# Altium PCB UART Converter use MCP2200.PcbDoc
Units mm, origin at the board's own origin, x right, y up, seen from the top; angles counter-clockwise.
Board outline 47.74 x 38.73 mm, 4 copper layers (Top Layer, GND, Power, Bottom Layer), stack 0.86 mm thick; 30 components, 25 nets, 105 pads, 32 vias.
Unrouted connection lines stored in the file: 24.
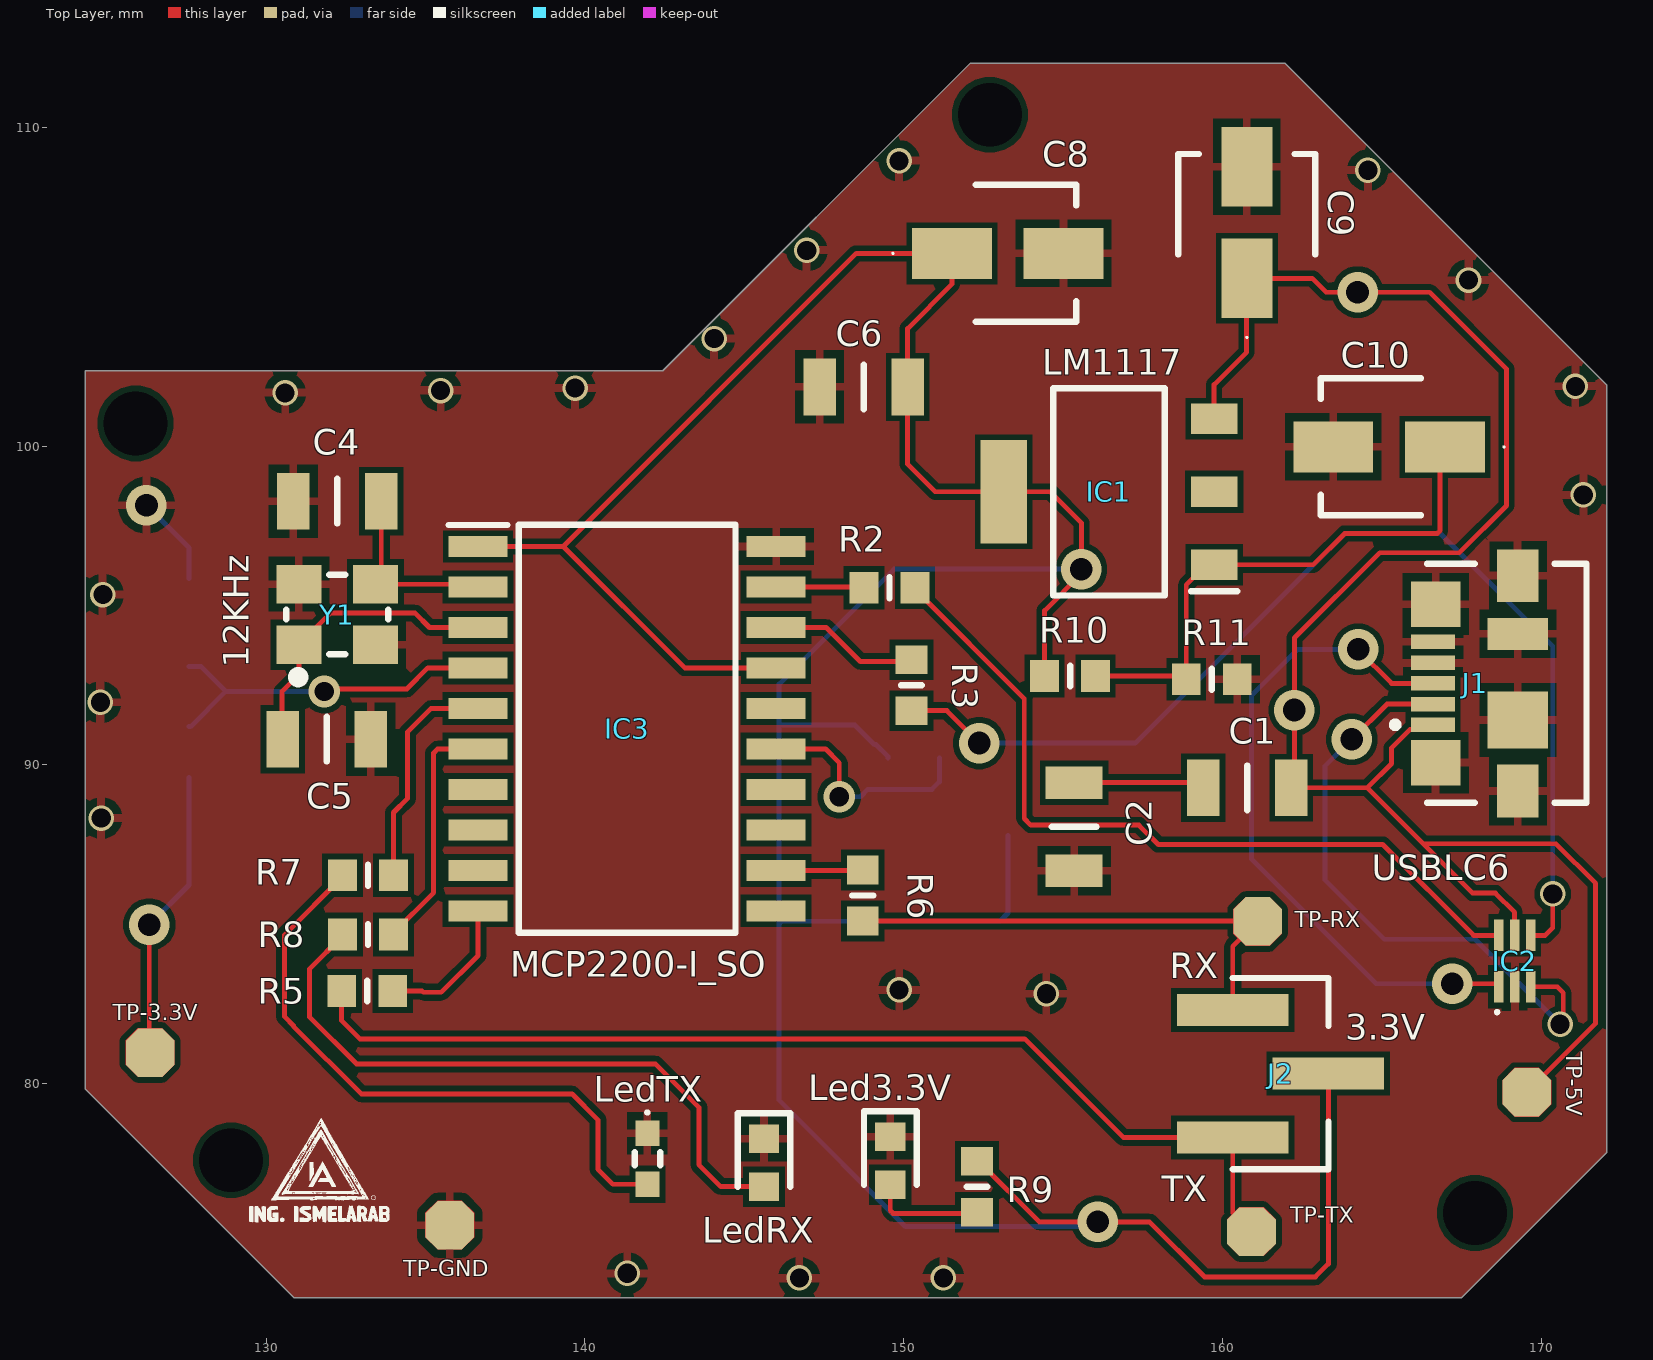
[diagram p0: Top Layer view]
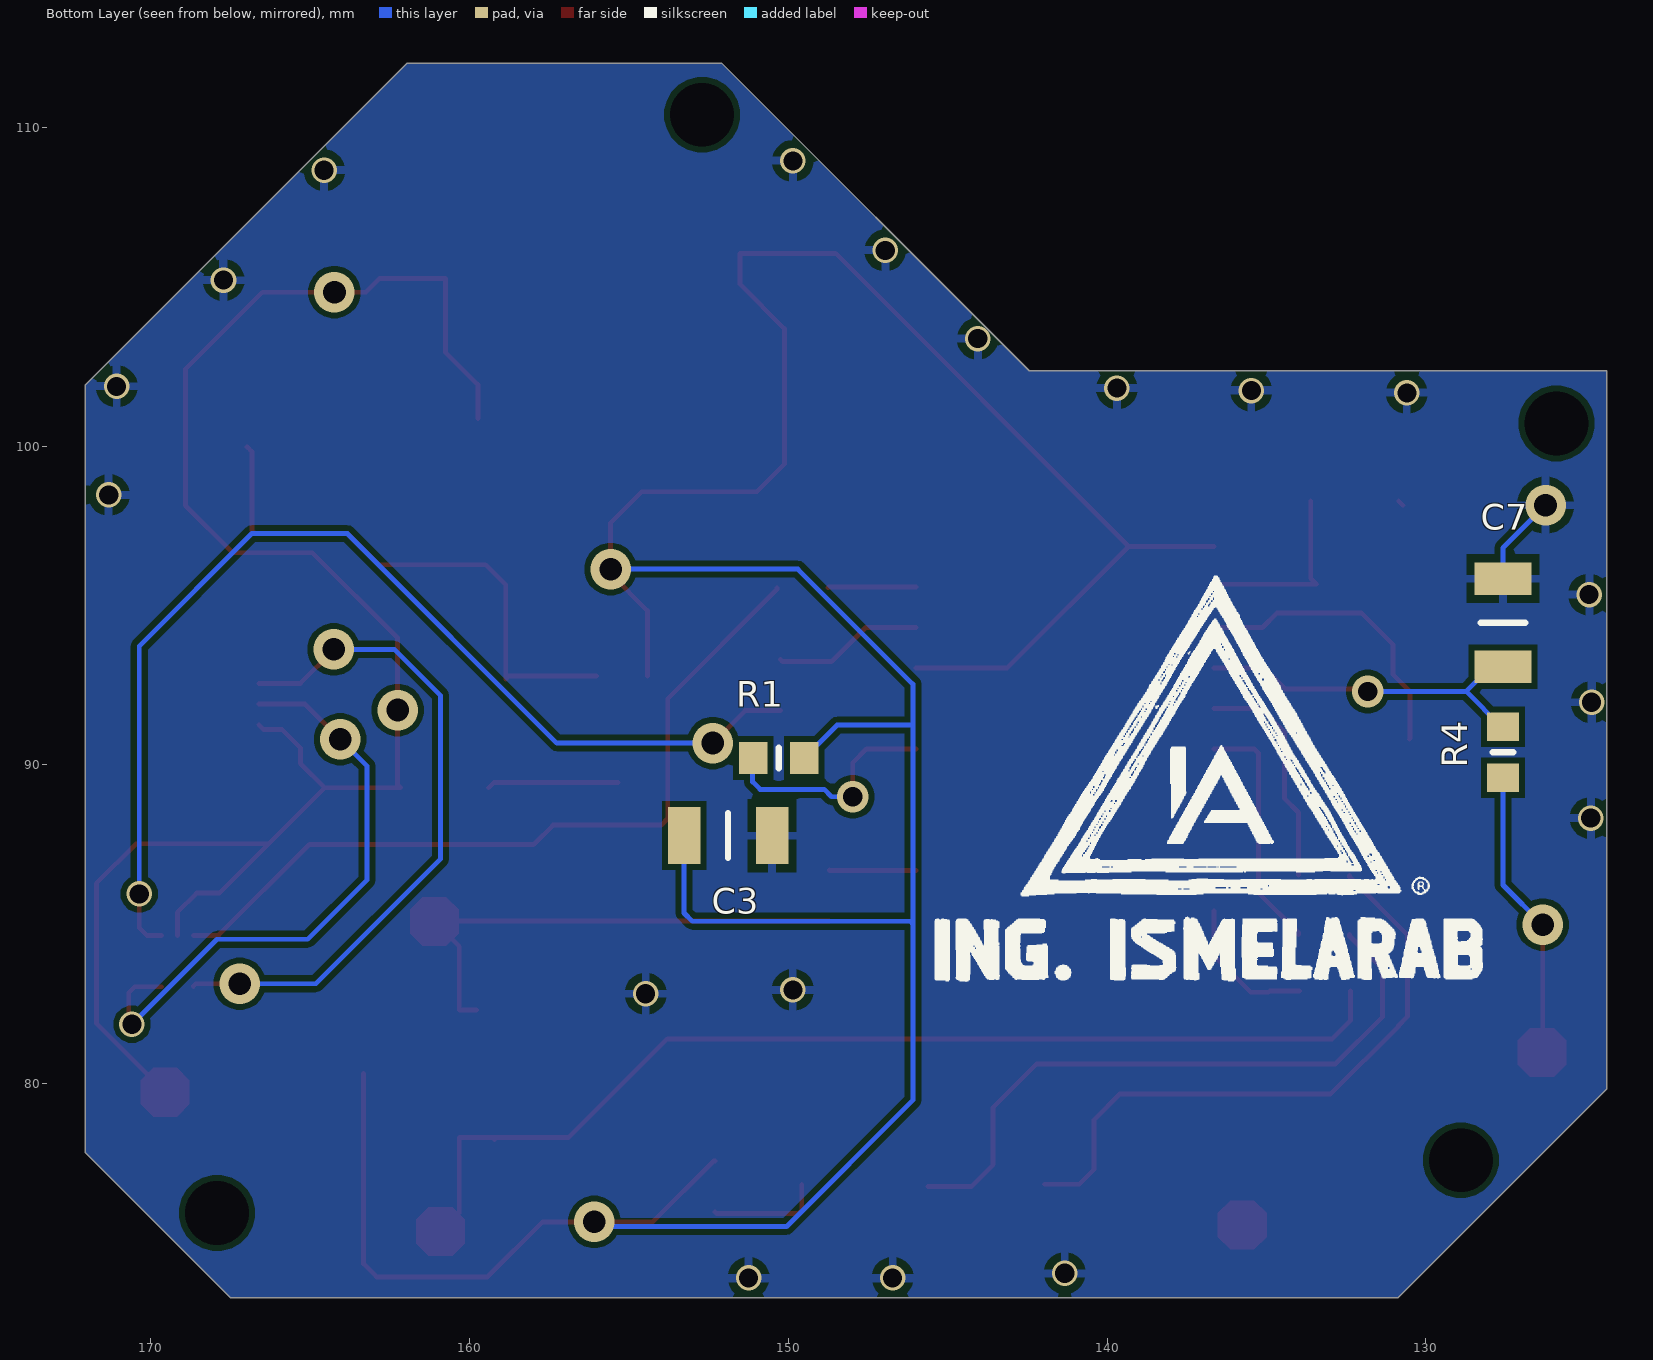
[diagram p1: Bottom Layer view, seen from below]
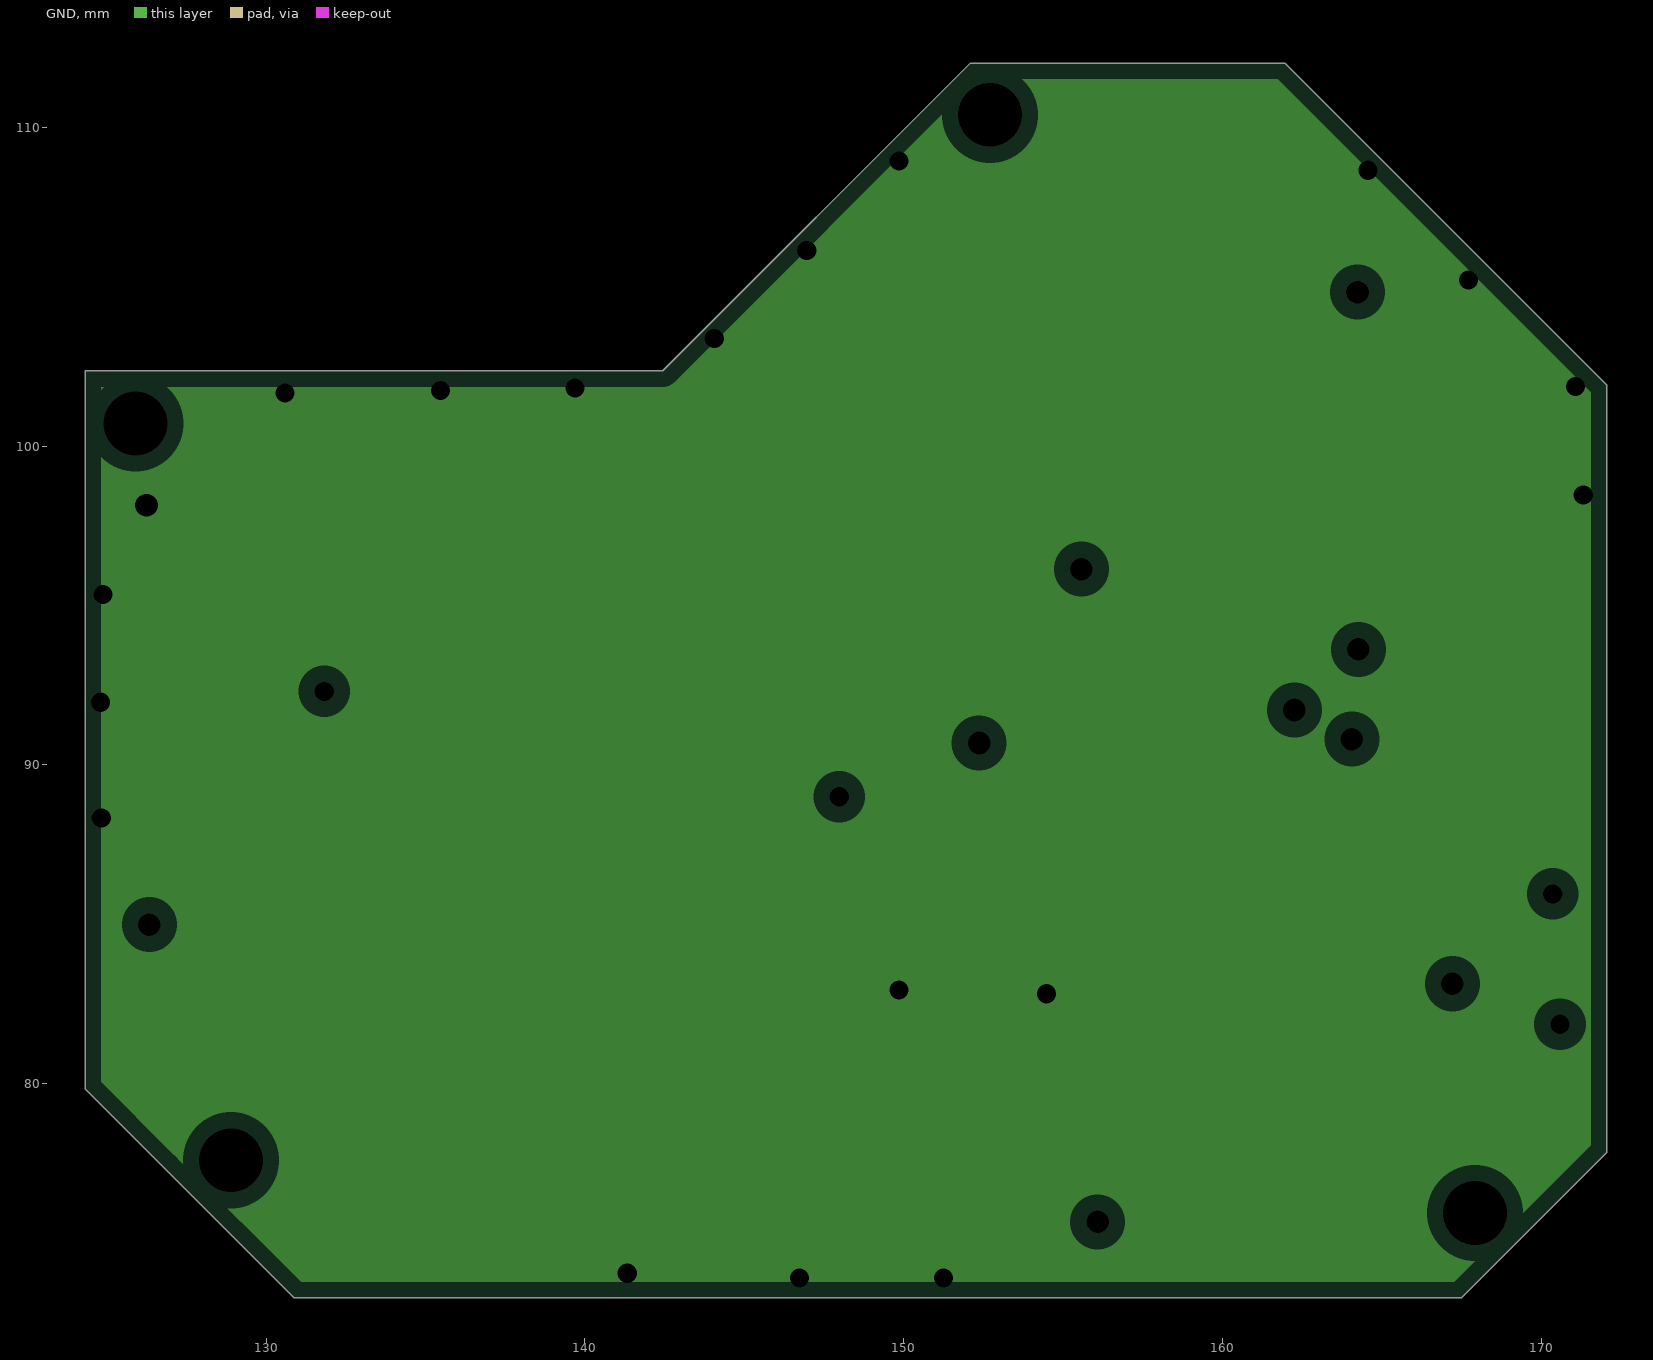
[diagram p2: GND, clearances drawn from the general rule]
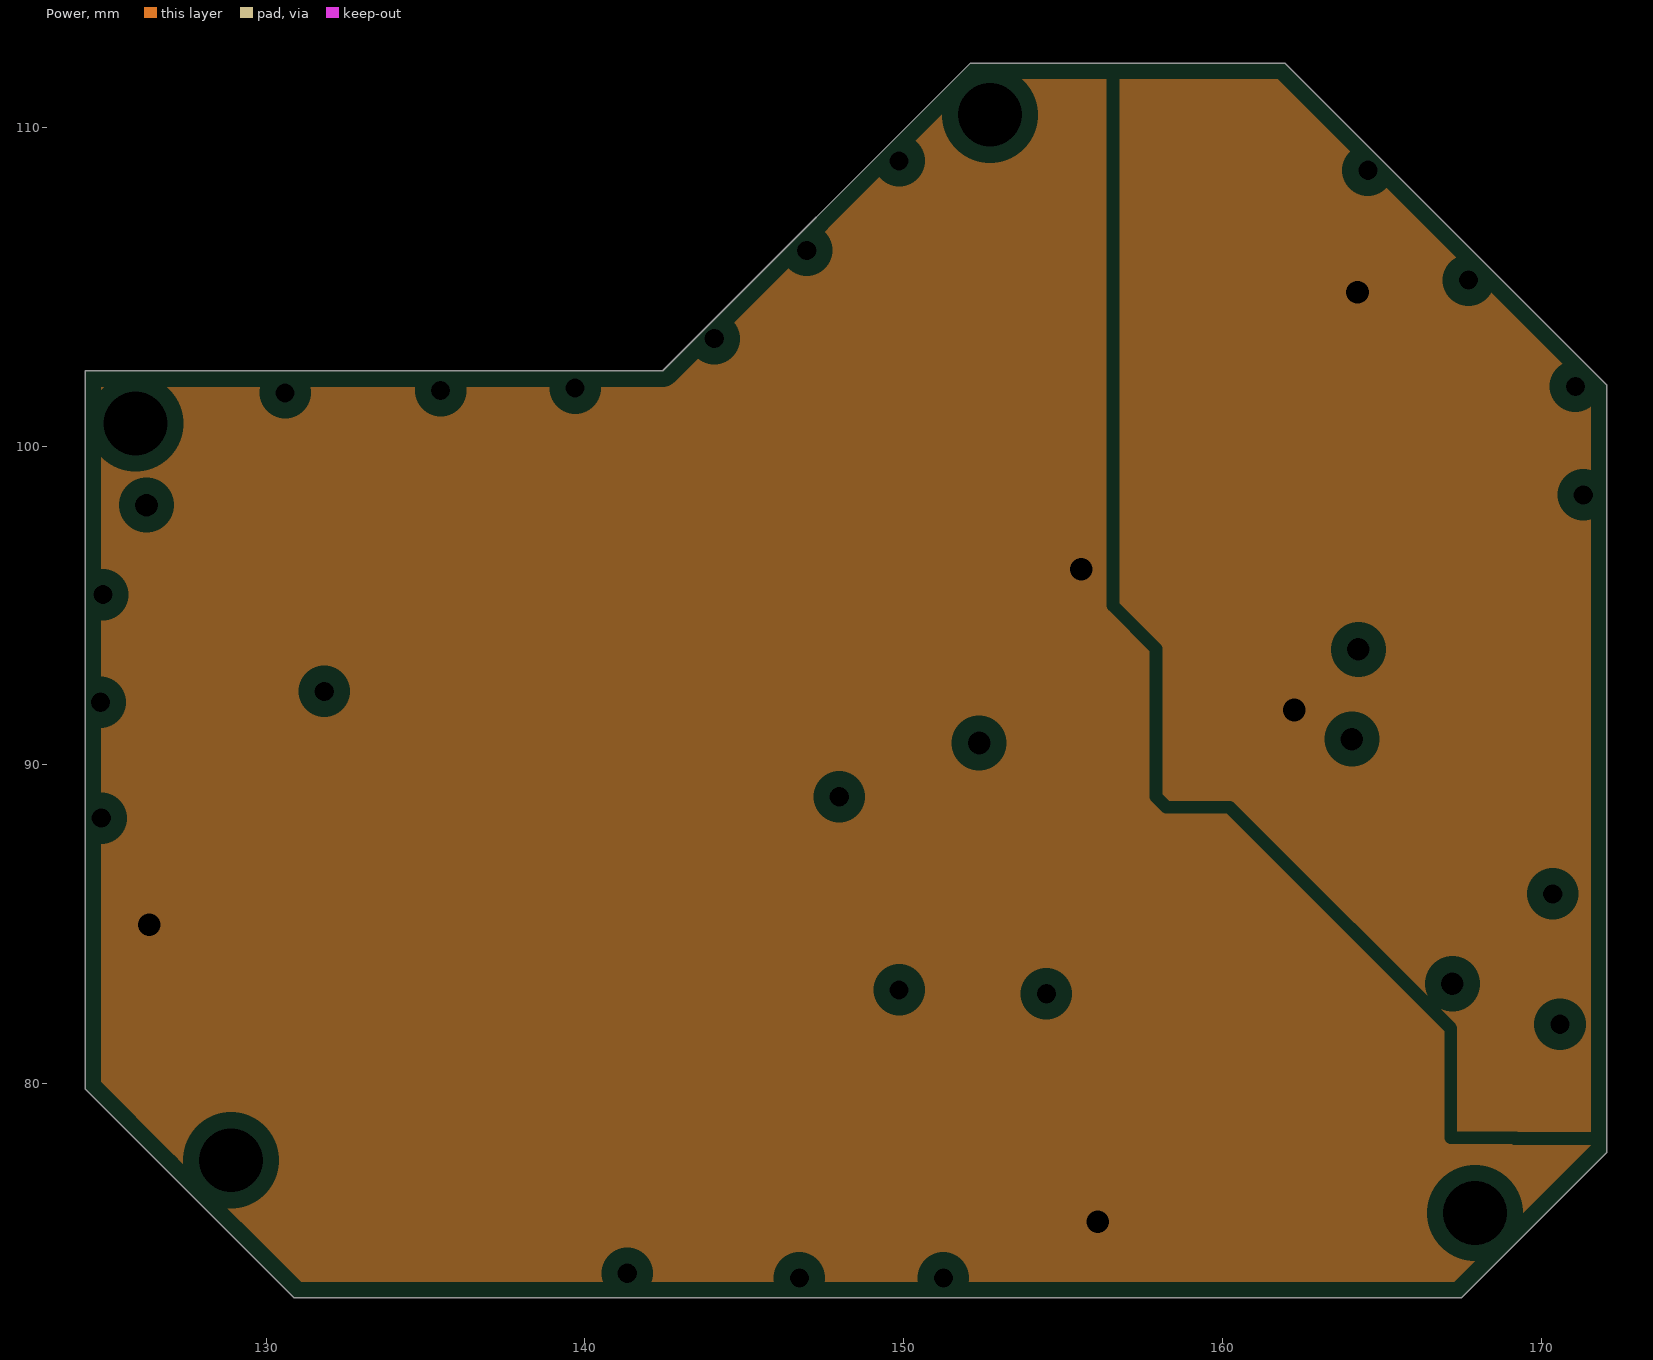
[diagram p3: Power, clearances drawn from the general rule]
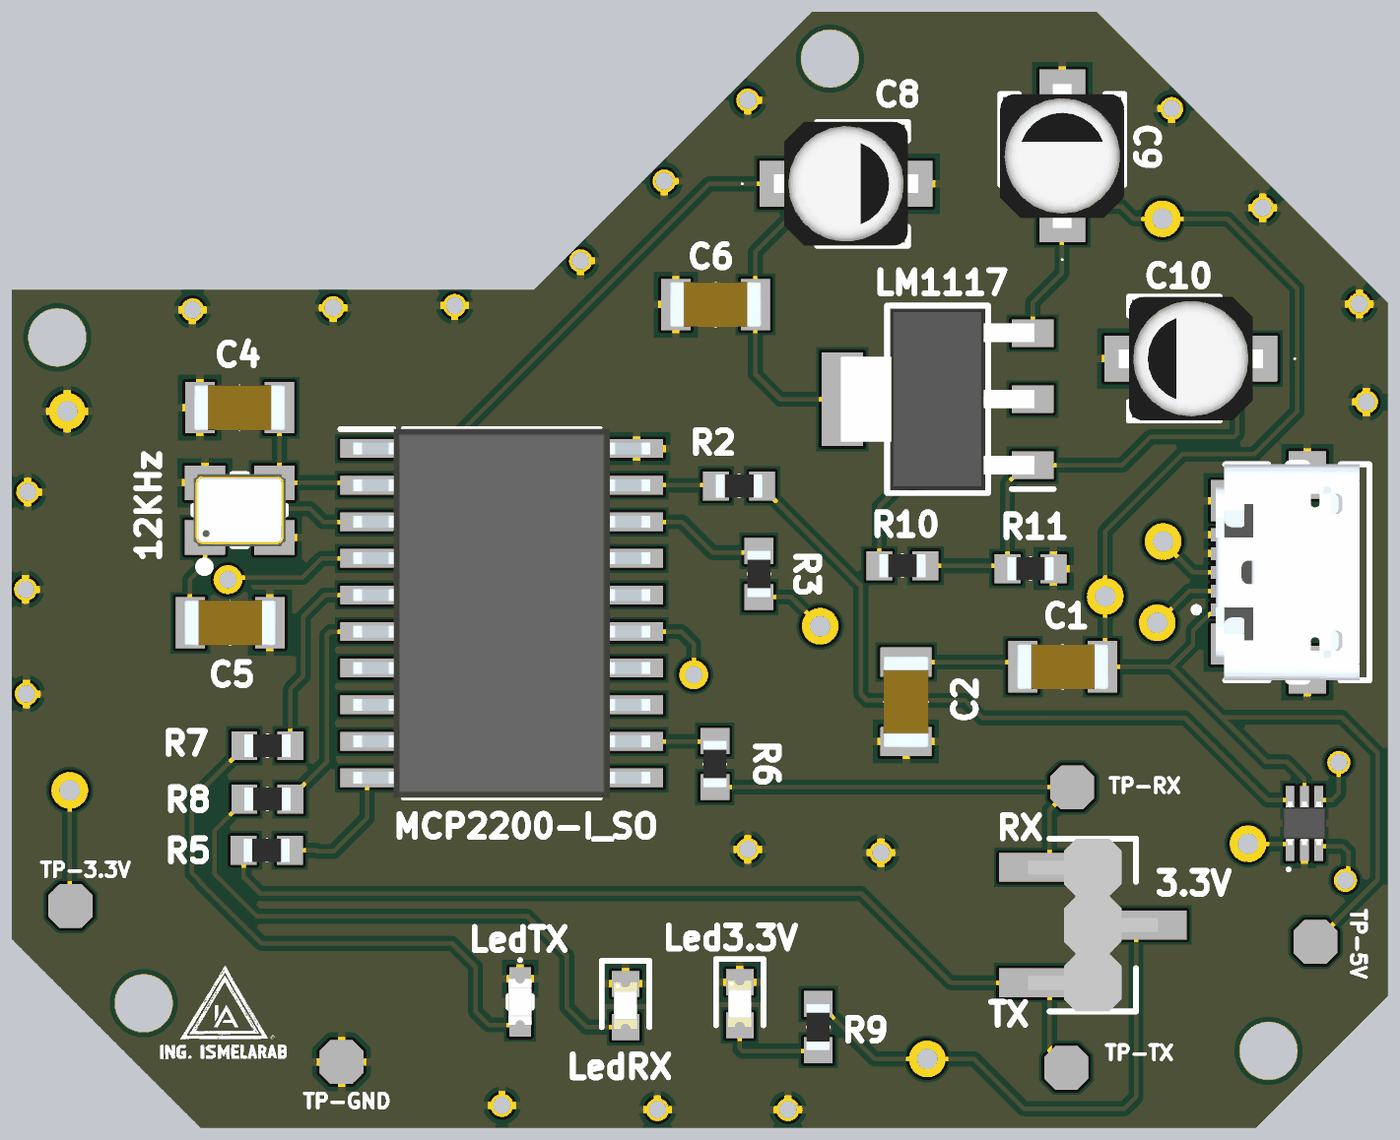
[diagram p4: 3D render of the assembled board from above, using the file's embedded part models]
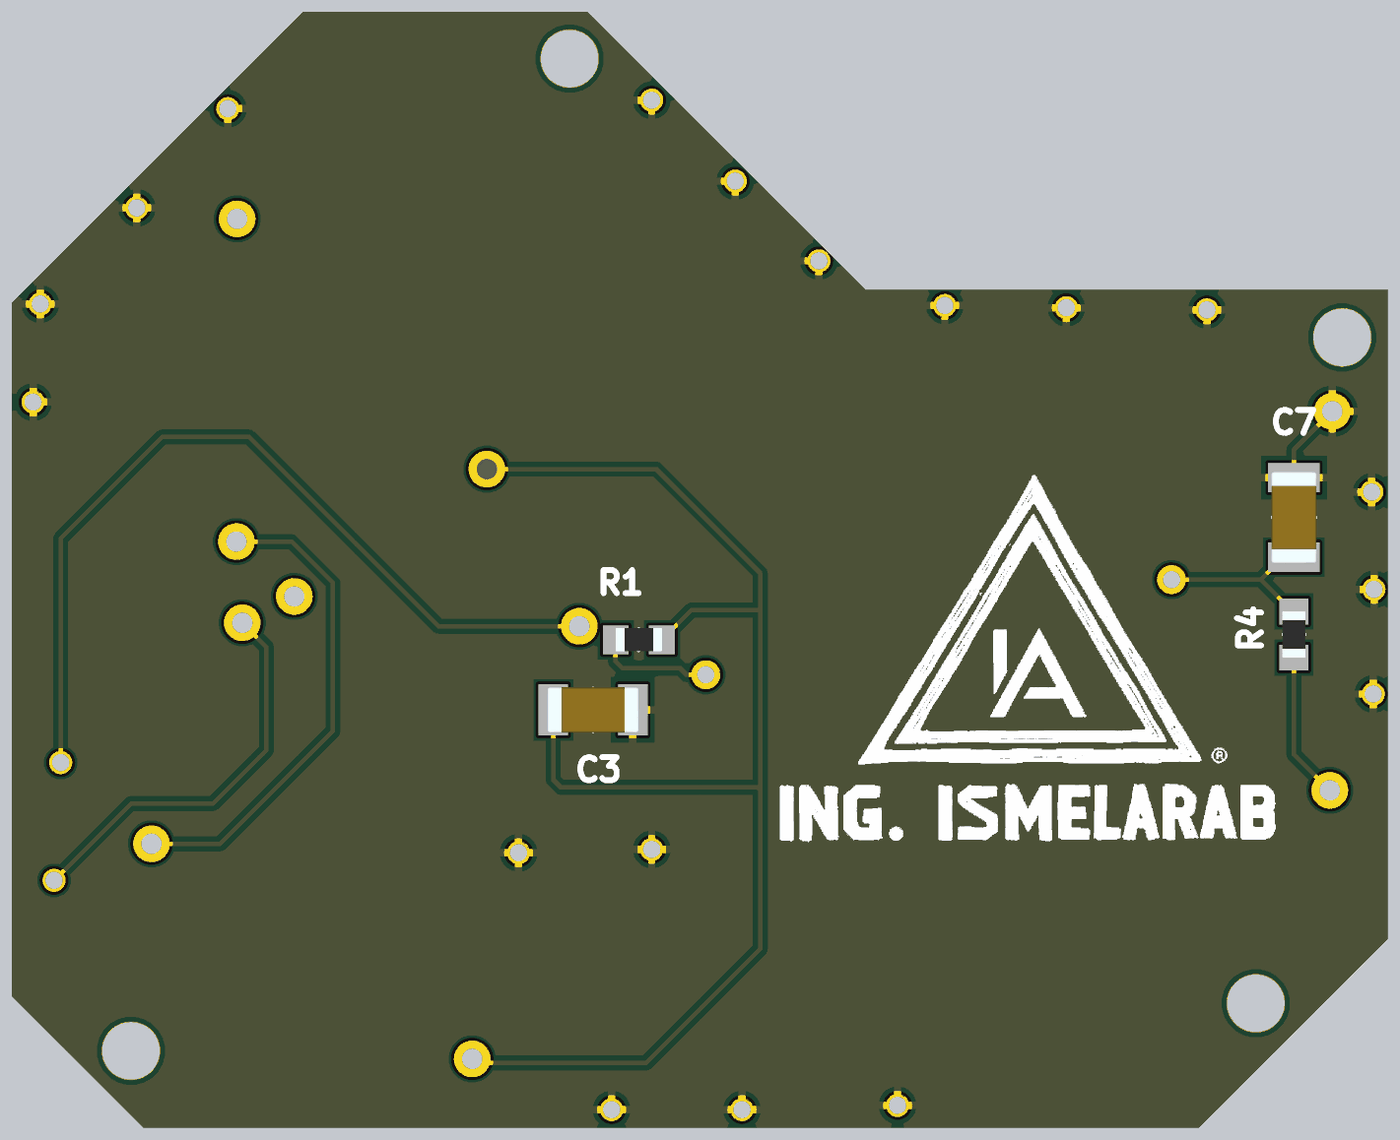
[diagram p5: 3D render of the assembled board from below, using the file's embedded part models]

## Layer stack, top to bottom
Top Solder: solder mask 0.0102, Solder Resist, Dk 3.5
Top Layer: signal copper 0.035
Dielectric 2: prepreg 0.2, FR-4, Dk 4.2
GND: plane copper 0.035, net GND
Dielectric 1: dielectric 0.32, FR-4, Dk 4.8
Power: plane copper 0.035, net (Multiple Nets)
Dielectric 5: prepreg 0.2, FR-4, Dk 4.2
Bottom Layer: signal copper 0.035
Bottom Solder: solder mask 0.0102, Solder Resist, Dk 3.5

## Board outline
124.323,79.842 126.822,77.343 130.886,73.279 167.488,73.279 172.06,77.851 172.06,101.905 161.95,112.014 152.095,112.014 142.443,102.362 124.323,102.362

## Design rules (kind name [scope] priority, off if disabled: settings)
Clearance Clearance_USB_Diff_Pair [InNetClass('USB_Diff_Pair')] p1: gap=0.18 ignorepadtopadclearanceinfootprint=FALSE
Clearance [All] p2: gap=0.18 ignorepadtopadclearanceinfootprint=FALSE except(0.05: SMDPad-SMDPad)
HoleSize [All] p1: absolutevalues=TRUE maxlimit=4 minlimit=0.025 maxpercent=80.000 minpercent=20.000
MinimumSolderMaskSliver [All] p1: minsoldermaskwidth=0.005
PlaneClearance [All] p1: clearance=0.508
PlaneConnect [All] p1: planeconnectstyle=Relief reliefexpansion=0.508 reliefentries=4 reliefconductorwidth=0.254 reliefairgap=0.254
PolygonConnect [All] p1: connectstyle=Relief reliefconductorwidth=0.254 reliefentries=4 polygonreliefangle="90 Angle" airgapwidth=0.254
RoutingVias [InNet('GND')] p1: holewidth=0.711 width=1.27 viastyle="Through Hole" minholewidth=0.6 minwidth=0.3 maxholewidth=0.711 maxwidth=1.27
SMDNeckDown [All] p1: percent=100.000
SilkToSilkClearance [All] p1: silktosilkclearance=0.001
SilkToSolderMaskClearance [IsPad] p1: minsilkscreentomaskgap=0.05 clearancetoexposedcopper=TRUE
SolderMaskExpansion [All] p1: expansion=0.102 istentingtop=FALSE
SupplyNets "Schematic Supply Nets_3" [InNet('3.3V')] p1: voltage=0.000
SupplyNets "Schematic Supply Nets_2" [InNet('PW3.3V')] p2: voltage=0.000
SupplyNets "Schematic Supply Nets_1" [InNet('PW5V')] p3: voltage=0.000
SupplyNets "Schematic Supply Nets" [InNet('GND')] p4: voltage=0.000
Width Width_USB_Diff_Pair [InNetClass('USB_Diff_Pair')] p1: maxlimit=0.4 minlimit=0.152 preferedwidth=0.2
Width [All] p2: maxlimit=0.4 minlimit=0.152 preferedwidth=0.152
24 further rules are at their usual default settings.

## Classes and differential pairs
polygon class PolygonClass_1: PW3.3V_L03_P016
polygon class PolygonGND: PW3.3V_L03_P016

## Components (designator, comment, footprint, x,y, rotation, side; value= is the part's Value field where it differs from the comment)
C1 "1uF" CAPC3216X100N 160.782,89.281 r0 top
C2 "0.1uF" CAPC3216X100N 155.346,88.062 r90 top
C3 "0.1uF" CAPC3216X100N 151.892,87.782 r180 bottom
C4 "22pF" CAPC3216X100N 132.232,98.273 r0 top
C5 "22pF" CAPC3216X100N 131.902,90.805 r180 top
C6 "0.1uF" CAPC3216X100N 148.742,101.854 r0 top
C7 "0.1uF" CAPC3216X100N 127.584,94.463 r270 bottom
C8 "100uF" EEE1AA220WR 153.264,106.045 r0 top
C9 "10uF" EEE1AA220WR 160.764,107.01 r90 top
C10 "10uF" EEE1AA220WR 165.227,99.974 r180 top
IC1 "LM1117" SOT229P700X180-4N 156.439,98.566 r180 top
IC2 "USBLC6" USBLC62P6 169.164,83.845 r0 top
IC3 "MCP2200-I_SO" SOIC127P1030X265-20N 141.326,91.135 r0 top
J1 "Micro USB" 0473461001 168.581,92.557 r90 top
J2 "2842102-3" 28421023 161.823,80.315 r90 top
Led3.3V "150060GS55040" LEDC1608X50N 149.581,77.584 r270 top (schematic designator LED3)
LedRX "150060SS55040" LEDC1608X50N 145.618,77.521 r270 top (schematic designator LED2)
LedTX "150060VS73220" 150060SS55040 141.961,77.648 r270 top (schematic designator LED1)
R1 "1.5k" RESC1608X55N 150.304,90.214 r180 bottom
R2 "22" RESC1608X55N 149.555,95.555 r180 top
R3 "22" RESC1608X55N 150.241,92.5 r90 top
R4 "10k" RESC1608X55N 127.584,90.399 r270 bottom
R5 "100" RESC1608X55N 133.172,82.906 r0 top
R6 "100" RESC1608X55N 148.717,85.903 r90 top
R7 "100" RESC1608X55N 133.198,86.538 r180 top
R8 "100" RESC1608X55N 133.198,84.684 r180 top
R9 "100" RESC1608X55N 152.298,76.772 r270 top
R10 "121" RESC1608X55N 155.219,92.786 r0 top
R11 "200" RESC1608X55N 159.664,92.685 r0 top
Y1 "12KHz" FA-238V 132.232,94.717 r0 top

## Footprints (in the part's own frame and the unit in brackets; to place one, negate y for a bottom-side part, rotate by r counter-clockwise, add the part's x,y. Pads: shape width x height; smd on the part's side, far side on the other; paste and mask are expansions set on the pad)
150060SS55040 [mm]
  rect 0.8x0.75 smd: 1(-0.8,0) 2(0.8,0)
  silkscreen extent -1.5,-0.4 0.2,0.4, body extent -0.8,-0.4 0.8,0.4, height 0.4
28421023 [mm]
  rect 1x3.5 smd: 1(-2,1.5) 2(0,-1.5) 3(2,1.5)
  silkscreen extent -3,-1.5 3,1.5, body extent -3,-2.25 3,2.25, height 6.1
0473461001 [mm]
  rect 0.45x1.38 smd: 1(-1.3,1.975) 2(-0.65,1.975) 3(0,1.975) 4(0.65,1.975) 5(1.3,1.975)
  rect 1.425x1.55 smd: MP1(-2.487,1.89) MP2(2.487,1.89)
  rect 1.65x1.3 smd: MP3(-3.375,-0.685) MP6(3.375,-0.685)
  rect 1.8x1.9 smd: MP4(-1.15,-0.685)
  rect 1x1.9 smd: MP5(1.55,-0.685)
  silkscreen extent -3.75,-2.84 3.75,3.26, body extent -3.9,-2.5 3.9,2.5, height 2.72
CAPC3216X100N [mm]
  rect 1.02x1.78 smd: 1(-1.38,0) 2(1.38,0)
  silkscreen extent 0,-0.7 0,0.7, body extent -1.6,-0.8 1.6,0.8, height 1
EEE1AA220WR [mm]
  rect 2.5x1.6 smd: 1(-1.75,0) 2(1.75,0)
  silkscreen extent -3.63,-2.15 2.15,2.15, body extent -2.5,-2.15 2.5,2.15, height 5.78
FA-238V [mm]
  rect 1.4x1.2 smd: 1(-1.2,-0.95) 2(1.2,-0.95) 3(1.2,0.95) 4(-1.2,0.95)
  silkscreen extent -1.6,-2.08 1.6,1.25, body extent -1.6,-1.25 1.6,1.25, height 0.7
LEDC1608X50N [mm]
  rect 0.9x0.95 smd: 1(-0.75,0) 2(0.75,0)
  silkscreen extent -1.55,-0.82 0.75,0.82, body extent -0.8,-0.4 0.8,0.4, height 0.4
RESC1608X55N [mm]
  rect 0.9x1 smd: 1(-0.8,0) 2(0.8,0)
  silkscreen extent 0,-0.33 0,0.33, body extent -0.8,-0.4 0.8,0.4, height 0.45
SOIC127P1030X265-20N [mm]
  rect 1.85x0.65 smd: 1(-4.675,5.715) 2(-4.675,4.445) 3(-4.675,3.175) 4(-4.675,1.905) 5(-4.675,0.635) 6(-4.675,-0.635) 7(-4.675,-1.905) 8(-4.675,-3.175) 9(-4.675,-4.445) 10(-4.675,-5.715) 11(4.675,-5.715) 12(4.675,-4.445) 13(4.675,-3.175) 14(4.675,-1.905) 15(4.675,-0.635) 16(4.675,0.635) 17(4.675,1.905) 18(4.675,3.175) 19(4.675,4.445) 20(4.675,5.715)
  silkscreen extent -5.6,-6.4 3.4,6.4, body extent -5.15,-6.4 5.15,6.4, height 2.65
SOT229P700X180-4N [mm]
  rect 1.45x0.95 smd: 1(-3.3,2.29) 2(-3.3,0) 3(-3.3,-2.29)
  rect 1.45x3.25 smd: 4(3.3,0)
  silkscreen extent -4.02,-3.25 1.75,3.25, body extent -3.35,-3.15 3.35,3.15, height 1.8
USBLC62P6 [mm]
  rect 0.3x0.99 smd: 1(-0.5,-0.805) 2(0,-0.805) 3(0.5,-0.805) 4(0.5,0.805) 5(0,0.805) 6(-0.5,0.805)
  silkscreen extent -0.6,-1.65 -0.5,-1.55, body extent -0.75,-0.75 0.75,0.75, height 0.46

## Part data
C1 C2 C3 C4 C5 C6 C7: library part CL31C220JBCNNNC, "Capacitor", Manufacturer_Name=SAMSUNG, Mouser Part Number=187-CL31C220JBCNNNC, Arrow Part Number=CL31C220JBCNNNC, Arrow Price/Stock=https://www.arrow.com/en/products/cl31c220jbcnnnc/samsung-electro-mechanics?region=nac, Datasheet Link=http://product.samsungsem.com/mlcc/CL31C220JBCNNN.do, Height=1mm, Manufacturer_Part_Number=CL31C220JBCNNNC, Mouser Price/Stock=https://www.mouser.co.uk/ProductDetail/Samsung-Electro-Mechanics/CL31C220JBCNNNC?qs=349EhDEZ59op%2FLhphPFLcA%3D%3D
C8 C9 C10: library part EEE1AA100NR, "Capacitor Polarised", Manufacturer_Name=Panasonic, Datasheet Link=http://industrial.panasonic.com/cdbs/www-data/pdf/RDE0000/ABA0000C1145.pdf, Height=5.5mm, Manufacturer_Part_Number=EEE1AA100NR
IC1: library part LM1117IMP-3.3_NOPB, "Integrated Circuit", Arrow Part Number=LM1117IMP-3.3/NOPB, Manufacturer_Name="Texas Instruments", Mouser Part Number=926-LM1117IMP3.3NOPB, Arrow Price/Stock=https://www.arrow.com/en/products/lm1117imp-3.3nopb/texas-instruments?utm_currency=USD&region=nac, Datasheet Link=https://www.ti.com/lit/ds/symlink/lm1117.pdf?ts=1607578196475&ref_url=https%253A%252F%252Fwww.google.com%252F, Height=1.8mm, Manufacturer_Part_Number=LM1117IMP-3.3/NOPB, Mouser Price/Stock=https://www.mouser.co.uk/ProductDetail/Texas-Instruments/LM1117IMP-3.3-NOPB?qs=X1J7HmVL2ZFbpN1TgOsjYQ%3D%3D
IC2: library part USBLC6-2P6, "Integrated Circuit", Manufacturer_Name=STMicroelectronics, Mouser Part Number=511-USBLC6-2P6, Arrow Part Number=USBLC6-2P6, Arrow Price/Stock=https://www.arrow.com/en/products/usblc6-2p6/stmicroelectronics?utm_currency=USD&region=nac, Datasheet Link=https://datasheet.lcsc.com/szlcsc/STMicroelectronics-USBLC6-2P6_C15999.pdf, Height=0.6mm, Manufacturer_Part_Number=USBLC6-2P6, Mouser Price/Stock=https://www.mouser.co.uk/ProductDetail/STMicroelectronics/USBLC6-2P6?qs=6ARB0lp6jlViGcbUSvj1Mw%3D%3D
IC3: "Integrated Circuit", Arrow Part Number=MCP2200-I/SO, Manufacturer_Name=Microchip, Mouser Part Number=579-MCP2200-I/SO, Arrow Price/Stock=https://www.arrow.com/en/products/mcp2200-iso/microchip-technology?region=nac, Datasheet Link=https://datasheet.datasheetarchive.com/originals/distributors/Datasheets-DGA2/214544.pdf, Height=2.65mm, Manufacturer_Part_Number=MCP2200-I/SO, Mouser Price/Stock=https://www.mouser.co.uk/ProductDetail/Microchip-Technology/MCP2200-I-SO?qs=kI7nsUnms46fN8L9VZlJCA%3D%3D
J1: library part 0473461001, "Connector", Manufacturer_Name=Molex, Mouser Part Number=N/A, Arrow Part Number=0473461001, Arrow Price/Stock=https://www.arrow.com/en/products/0473461001/molex?region=nac, Datasheet Link=https://componentsearchengine.com/Datasheets/1/0473461001.pdf, Height=2.45mm, Manufacturer_Part_Number=0473461001, Mouser Price/Stock=https://www.mouser.co.uk/ProductDetail/Molex/0473461001?qs=2bnkQPT%252BPafTZgGVt%2FOGfA%3D%3D
J2: "Connector", Manufacturer_Name="TE Connectivity", Mouser Part Number=571-2842102-3, Arrow Part Number=2842102-3, Arrow Price/Stock=null?region=nac, Datasheet Link=https://componentsearchengine.com/Datasheets/2/2842102-3.pdf, Height=7.85mm, Manufacturer_Part_Number=2842102-3, Mouser Price/Stock=https://www.mouser.co.uk/ProductDetail/TE-Connectivity/2842102-3?qs=Cb2nCFKsA8rGL40bBL%2F7Zw%3D%3D
Led3.3V: "LED", Manufacturer_Name="Wurth Elektronik", Mouser Part Number=710-150060GS55040, Datasheet Link=https://katalog.we-online.de/led/datasheet/150060GS55040.pdf, Height=0.5mm, Manufacturer_Part_Number=150060GS55040, Mouser Price/Stock=https://www.mouser.co.uk/ProductDetail/Wurth-Elektronik/150060GS55040?qs=fAHHVMwC%252Bbhr5Aln2oA6Nw%3D%3D
LedRX: "LED", Manufacturer_Name="Wurth Elektronik", Mouser Part Number=710-150060SS55040, Datasheet Link=https://www.mouser.com/datasheet/2/445/150060SS55040-1714139.pdf, Manufacturer_Part_Number=150060SS55040, Mouser Price/Stock=https://www.mouser.co.uk/ProductDetail/Wurth-Elektronik/150060SS55040?qs=8Aam6%252B7C6HG0AGgMR5PhFg%3D%3D
LedTX: "LED", Manufacturer_Name="Wurth Elektronik", Mouser Part Number=710-150060VS73220, Datasheet Link=https://componentsearchengine.com/Datasheets/2/150060VS73220.pdf, Manufacturer_Part_Number=150060VS73220, Mouser Price/Stock=https://www.mouser.co.uk/ProductDetail/Wurth-Elektronik/150060VS73220?qs=8Aam6%252B7C6HEF3HOqTkc72A%3D%3D
R1 R2 R3 R4 R5 R6 R7 R8 R9 R10 R11: library part ERJ-3EKF1001V, "Resistor", Manufacturer_Name=Panasonic, Mouser Part Number=667-ERJ-3EKF1001V, Arrow Part Number=ERJ-3EKF1001V, Arrow Price/Stock=https://www.arrow.com/en/products/erj-3ekf1001v/panasonic?region=nac, Datasheet Link=http://industrial.panasonic.com/cdbs/www-data/pdf/RDA0000/AOA0000C86.pdf, Height=0.55mm, Manufacturer_Part_Number=ERJ-3EKF1001V, Mouser Price/Stock=https://www.mouser.co.uk/ProductDetail/Panasonic/ERJ-3EKF1001V?qs=H7k1u0Mp9JTM8yQxOuvoDg%3D%3D
Y1: library part FA-238V_12.0000MB-W3, "Crystal or Oscillator", Arrow Part Number="FA-238V 12.0000MB-W3", Manufacturer_Name="Epson Timing", Mouser Part Number=732-FA-238V12MB-W3, Arrow Price/Stock=https://www.arrow.com/en/products/fa-238v12.0000mb-w3/epson-electronics-america?region=nac, Datasheet Link=https://www.digikey.ph/en/products/detail/epson/FA-238V-12-0000MB-W3/2403375?s=N4IgTCBcDaIGIEEC0YDMAOAagAgIxgDoAGEogWQCEkB1VEAXQF8g, Manufacturer_Part_Number="FA-238V 12.0000MB-W3", Mouser Price/Stock=https://www.mouser.co.uk/ProductDetail/Epson-Timing/FA-238V-12.0000MB-W3?qs=HV%2FSjD3ivR9sYuOPaMueQA%3D%3D

## Free pads (board coordinates)
  oval 1.5x1.524 hole 2: 14(128.905,77.597) 14(152.705,110.388) 14(167.919,75.946) 15(125.908,100.711)
  oct 1.524x1.524 smd: 16(126.365,80.975) 16(160.909,75.362) 16(161.104,85.09) 16(169.545,79.731) 17(135.763,75.565)

## Via types
v1: diameter 0.8, hole 0.6, Top Layer to Bottom Layer, 20 vias
v2: diameter 1.27, hole 0.711, Top Layer to Bottom Layer, 10 vias
v3: diameter 1, hole 0.6, Top Layer to Bottom Layer, 2 vias

## Nets (pads, with @x,y where several pads share a name; then routed paths per layer and width w, separated by ;. In a path a pad name is that pad's centre, name@x,y a point inside that pad or via, vN(x,y) a via of type N, cw(c..) or ccw(c..) an arc to the next point about the centre after c; other vN are vias at no path point)
3.3V: 
Conf: IC3.15 R1.1 | length 7.3
  Top Layer w0.152: IC3.15 147.549,90.5 147.98,90.068 v3(147.98,89.002)
  Bottom Layer w0.152: v3(147.98,89.002) 148.646,89.002 148.874,89.23 150.885,89.23 151.119,89.464 R1.1@151.119,90.214
D+: IC2.1 J1.3 | length 21.3
  Top Layer w0.152: v2(164.262,93.624) 164.262,93.599 165.304,92.557 J1.3 ; v2(167.208,83.134) 168.59,83.134 168.664,83.06 IC2.1
  Bottom Layer w0.152: v2(164.262,93.624) 162.354,93.624 160.914,92.185 160.914,87.04 164.821,83.134 v2(167.208,83.134)
D+1: IC2.6 R2.1 | length 25.1
  Top Layer w0.152: R2.1 150.355,95.505 153.782,92.078 153.782,88.318 153.987,88.113 157.378,88.113 157.988,87.503 165.024,87.503 167.876,84.65 IC2.6
D+2: IC3.19 R2.2 | length 2.8
  Top Layer w0.152: IC3.19 148.73,95.58 R2.2
D-: IC2.3 J1.2 | length 19.1
  Top Layer w0.152: v2(164.059,90.805) 165.161,91.907 J1.2 ; IC2.3 170.502,83.04 170.688,82.855 170.688,81.966 v1(170.586,81.864)
  Bottom Layer w0.152: v2(164.059,90.805) 163.22,89.967 163.22,86.385 165.075,84.531 167.919,84.531 v1(170.586,81.864)
D-1: IC2.4 R3.1 | length 34.4
  Top Layer w0.152: R3.1 151.354,91.7 v2(152.369,90.685) ; IC2.4 170.121,84.65 170.358,84.887 v1(170.358,85.954)
  Bottom Layer w0.152: v2(152.369,90.685) 157.258,90.685 163.83,97.257 166.828,97.257 170.358,93.727 v1(170.358,85.954)
D-2: IC3.18 R3.2 | length 4.7
  Top Layer w0.152: IC3.18 147.574,94.31 148.641,93.243 150.184,93.243 R3.2
GND: C2.1 C3.2 C4.1 C5.1 C6.1 C7.1 C8.2 C9.2 C10.2 IC2.2 IC3.20 J1.4 J1.5 J1.MP1 J1.MP2 J1.MP3 J1.MP4 J1.MP5 J1.MP6 Led3.3V.1 LedRX.1 LedTX.1 pad.17 R11.2 Y1.2 Y1.4 | length 3
  Top Layer w0.152: C4.1@130.725,98.146 C4.1
  Bottom Layer w0.152: v2(126.251,98.146) 127.584,96.812 C7.1
  other v1: 146.727,73.906 151.249,73.906 141.332,74.054 154.474,82.822 149.857,82.94 124.833,88.333 124.807,91.965 124.883,95.344 171.315,98.466 130.599,101.666 135.476,101.742 139.692,101.818 171.067,101.871 144.061,103.369 167.716,105.207 146.959,106.136 164.559,108.651 149.858,108.945
LED3.3V: Led3.3V.2 R9.2 | length 3.6
  Top Layer w0.152: Led3.3V.2 149.581,76.023 149.67,75.934 152.26,75.934 R9.2
LEDRX: LedRX.2 R8.2 | length 20.5
  Top Layer w0.152: R8.2 132.398,84.634 131.369,83.605 131.369,82.088 132.837,80.62 142.215,80.62 143.576,79.258 143.576,77.461 144.266,76.771 LedRX.2
LEDTX: LedTX.2 R7.2 | length 19.7
  Top Layer w0.152: R7.2 132.398,86.488 130.581,84.672 130.581,82.104 130.859,81.827 130.859,81.807 132.986,79.68 139.598,79.68 140.411,78.867 140.411,77.318 140.881,76.848 LedTX.2
NetC1_1: C1.1 C2.2 | length 4.1
  Top Layer w0.152: C2.2 159.241,89.442 C1.1
NetC10_1: C10.1 IC1.1 R10.2 R11.1 | length 17.2
  Top Layer w0.152: R10.2 158.763,92.786 R11.1 158.864,95.651 159.489,96.276 IC1.1 162.849,96.276 163.83,97.257 166.738,97.257 166.828,97.346 166.828,99.825 C10.1
PW3.3V: C3.1 C6.2 C8.1 IC1.4 IC3.1 IC3.17 J2.2 pad.16@126.365,80.975 R1.2 R4.2 R9.1 R10.1 | length 122.9
  Top Layer w0.152: v2(126.34,84.988) 126.34,81.001 pad.16@126.365,80.975 ; IC3.1 139.322,96.85 ; IC3.17 143.132,93.04 139.322,96.85 ; R9.1 152.348,77.572 154.253,75.667 v2(156.083,75.667) 157.709,75.667 159.436,73.939 162.916,73.939 163.323,74.347 J2.2 ; R10.1 154.419,94.838 155.575,95.993 v2(155.575,96.139) 155.575,97.59 154.6,98.566 IC1.4 150.985,98.566 150.122,99.428 C6.2 150.122,103.684 151.514,105.075 C8.1 148.517,106.045 139.322,96.85
  Bottom Layer w0.152: v2(126.34,84.988) 127.584,86.233 R4.2 ; R1.2 149.504,90.264 149.131,90.638 149.081,90.638 148.469,91.25 146.093,91.25 ; C3.1 153.272,85.353 153.014,85.095 146.182,85.095 146.093,85.006 146.093,84.915 ; v2(155.575,96.139) 149.699,96.139 146.093,92.533 146.093,91.25 ; v2(156.083,75.667) 155.938,75.522 150.056,75.522 146.093,79.484 146.093,84.915 ; 146.093,84.915 146.093,91.25
PW5V: C1.2 C9.1 IC1.3 IC2.5 J1.1 pad.16@169.545,79.731 | length 57.4
  Top Layer w0.152: IC1.3 159.739,101.928 160.757,102.946 160.757,105.253 C9.1 162.816,105.26 163.25,104.826 v2(164.236,104.826) 166.497,104.826 168.91,102.413 168.91,98.136 167.429,96.655 164.931,96.655 162.255,93.98 v2(162.255,91.719) 162.255,89.374 C1.2 164.541,89.281 ; J1.1 166.457,91.108 165.879,91.108 165.303,90.532 165.303,90.043 164.541,89.281 ; IC2.5 169.164,85.374 168.559,85.978 167.844,85.978 166.294,87.528 ; pad.16@169.545,79.731 171.704,81.89 171.704,86.284 170.459,87.528 166.294,87.528 ; 164.541,89.281 166.294,87.528
RX: J2.3 pad.16@161.104,85.09 R6.1 | length 16
  Top Layer w0.152: R6.1 161.091,85.103 161.104,85.09 160.323,84.31 J2.3 J2.3@159.773,82.315
RXLED: IC3.6 R8.1 | length 7.7
  Top Layer w0.152: R8.1 133.998,84.734 135.255,85.991 135.255,90.373 135.382,90.5 IC3.6
TX: J2.1 pad.16@160.909,75.362 R5.1 | length 33.7
  Top Layer w0.152: R5.1 132.372,81.978 132.944,81.407 153.797,81.407 156.889,78.315 J2.1 160.323,75.947 pad.16@160.909,75.362 ; J2.1@159.193,78.302 159.18,78.289 J2.1@159.218,78.251
TXLED: IC3.5 R7.1 | length 7.2
  Top Layer w0.152: R7.1 133.998,88.506 134.442,88.951 134.442,91.034 135.179,91.77 IC3.5
Uc: C4.2 IC3.2 Y1.3 | length 5.9
  Top Layer w0.152: C4.2 133.612,95.847 Y1.3 136.564,95.667 IC3.2
Uc1: C5.2 IC3.3 Y1.1 | length 9.4
  Top Layer w0.152: C5.2 130.505,90.822 130.505,92.304 131.032,92.831 Y1.1 132.034,94.768 134.67,94.768 135.128,94.31 IC3.3
Uc2: C7.2 IC3.4 R4.1 | length 11.3
  Top Layer w0.152: v3(131.826,92.304) 131.902,92.38 134.417,92.38 135.077,93.04 IC3.4
  Bottom Layer w0.152: R4.1 127.634,91.199 128.739,92.304 ; C7.2 127.964,93.083 128.739,92.308 128.739,92.304 ; v3(131.826,92.304) 128.739,92.304
Uc5: IC3.10 R5.2 | length 4.6
  Top Layer w0.152: R5.2 134.902,82.906 134.94,82.867 135.496,82.867 136.651,84.022 IC3.10
Uc6: IC3.12 R6.2 | length 2.7
  Top Layer w0.152: IC3.12 148.704,86.69 R6.2
pads on no net: IC1.2 IC3.7 IC3.8 IC3.9 IC3.11 IC3.13 IC3.14 IC3.16

## Polygon pours and split planes (outlines as drawn)
GND on Bottom Layer "GNDNET_L01_P018" (solid, pour order 18): 124.323,79.842 126.822,77.343 130.886,73.279 167.488,73.279 172.06,77.851 172.06,101.905 161.95,112.014 152.095,112.014 142.443,102.362 124.323,102.362
GND on Top Layer "GND_L01_P019" (solid, pour order 19): 124.323,79.842 126.822,77.343 130.886,73.279 167.488,73.279 172.06,77.851 172.06,101.905 161.95,112.014 152.095,112.014 142.443,102.362 124.323,102.362
PW3.3V on Power (split plane): 156.364,106.756 156.369,106.718 156.364,106.68 156.364,94.996 156.371,94.944 156.391,94.895 156.423,94.853 157.715,93.561 157.715,88.999 157.722,88.947 157.742,88.899 157.774,88.857 158.101,88.53 158.143,88.498 158.191,88.478 158.243,88.471 160.138,88.471 160.69,87.919 166.956,81.654 166.956,78.308 166.963,78.256 166.983,78.207 167.015,78.166 167.057,78.134 167.105,78.113 167.157,78.106 169.067,78.106 169.112,78.088 169.164,78.081 171.549,78.081 171.549,78.062 167.276,73.789 131.098,73.789 127.183,77.704 124.833,80.054 124.833,101.852 142.443,101.852 142.543,101.861 142.639,101.89 142.727,101.938 142.804,102.001 152.307,111.504 156.364,111.504
PW5V on Power (split plane): 171.549,101.693 171.549,78.485 169.286,78.485 169.242,78.503 169.189,78.51 167.359,78.51 167.359,81.737 167.352,81.789 167.332,81.838 167.3,81.88 160.975,88.204 160.364,88.815 160.323,88.848 160.274,88.868 160.222,88.875 158.327,88.875 158.119,89.083 158.119,93.645 158.112,93.697 158.092,93.746 158.06,93.787 156.767,95.08 156.767,106.68 156.762,106.718 156.767,106.756 156.767,111.504 161.739,111.504
GND on GND (split plane): 171.549,101.693 171.549,78.062 167.276,73.789 131.098,73.789 127.183,77.704 124.833,80.054 124.833,101.852 142.443,101.852 142.543,101.861 142.639,101.89 142.727,101.938 142.804,102.001 152.307,111.504 161.739,111.504

## Other copper
Top Layer:
  region net PW5V: 169.164,78.969 168.783,79.35 168.783,80.112 169.164,80.493 169.926,80.493 170.307,80.112 170.307,79.35 169.926,78.969
  region net RX: 160.723,84.328 160.342,84.709 160.342,85.471 160.723,85.852 161.485,85.852 161.866,85.471 161.866,84.709 161.485,84.328
  region net TX: 160.528,74.6 160.147,74.981 160.147,75.743 160.528,76.124 161.29,76.124 161.671,75.743 161.671,74.981 161.29,74.6
  region net GND: 135.382,74.803 135.001,75.184 135.001,75.946 135.382,76.327 136.144,76.327 136.525,75.946 136.525,75.184 136.144,74.803
  region net PW3.3V: 125.984,80.213 125.603,80.594 125.603,81.356 125.984,81.737 126.746,81.737 127.127,81.356 127.127,80.594 126.746,80.213
Power (plane layer: these items are gaps in the copper):
  lines w0.4: 156.566,106.68 156.566,94.996 157.917,93.645 157.917,88.999 158.243,88.673 160.222,88.673 160.833,88.062 167.157,81.737 167.157,78.308 169.189,78.308 ; 156.566,106.756 156.566,112.014 ; 169.164,78.283 171.78,78.283

## Silkscreen, mask and mechanical layers (free items; w line width, h text height)
Top Overlay:
  drawing of 20 lines, arcs and shapes, not listed
  text "TP-RX" at 162.261,84.909 h0.5
  text "RX" at 158.344,83.312 h0.8
  text "TP-3.3V" at 125.193,81.988 h0.5
  text "3.3V" at 163.855,81.382 h0.8
  text "TP-5V" at 170.79,80.995 h0.5 r270
  text "TX" at 158.102,76.315 h0.8
  text "TP-TX" at 162.125,75.638 h0.5
  text "TP-GND" at 134.312,73.962 h0.5
Bottom Overlay:
  drawing of 22 lines, arcs and shapes, not listed
Mechanical 1:
  lines w0.2: 47.85,57 47.909,56.941 ; 124.323,79.842 126.822,77.343 130.886,73.279 137.668,73.279 167.488,73.279 172.06,77.851 172.06,101.905 161.95,112.014 152.095,112.014 142.443,102.362 124.323,102.362 124.323,92.485 124.323,79.842